# Altium PCB My驱动_V5.PcbDoc
Units mil, origin at the board's own origin, x right, y up, seen from the top; angles counter-clockwise.
Board outline 2237.44 x 1850 mil, 2 copper layers (Top Layer, Bottom Layer); 43 components, 30 nets, 119 pads, 69 vias.
Unrouted connection lines stored in the file: 18.
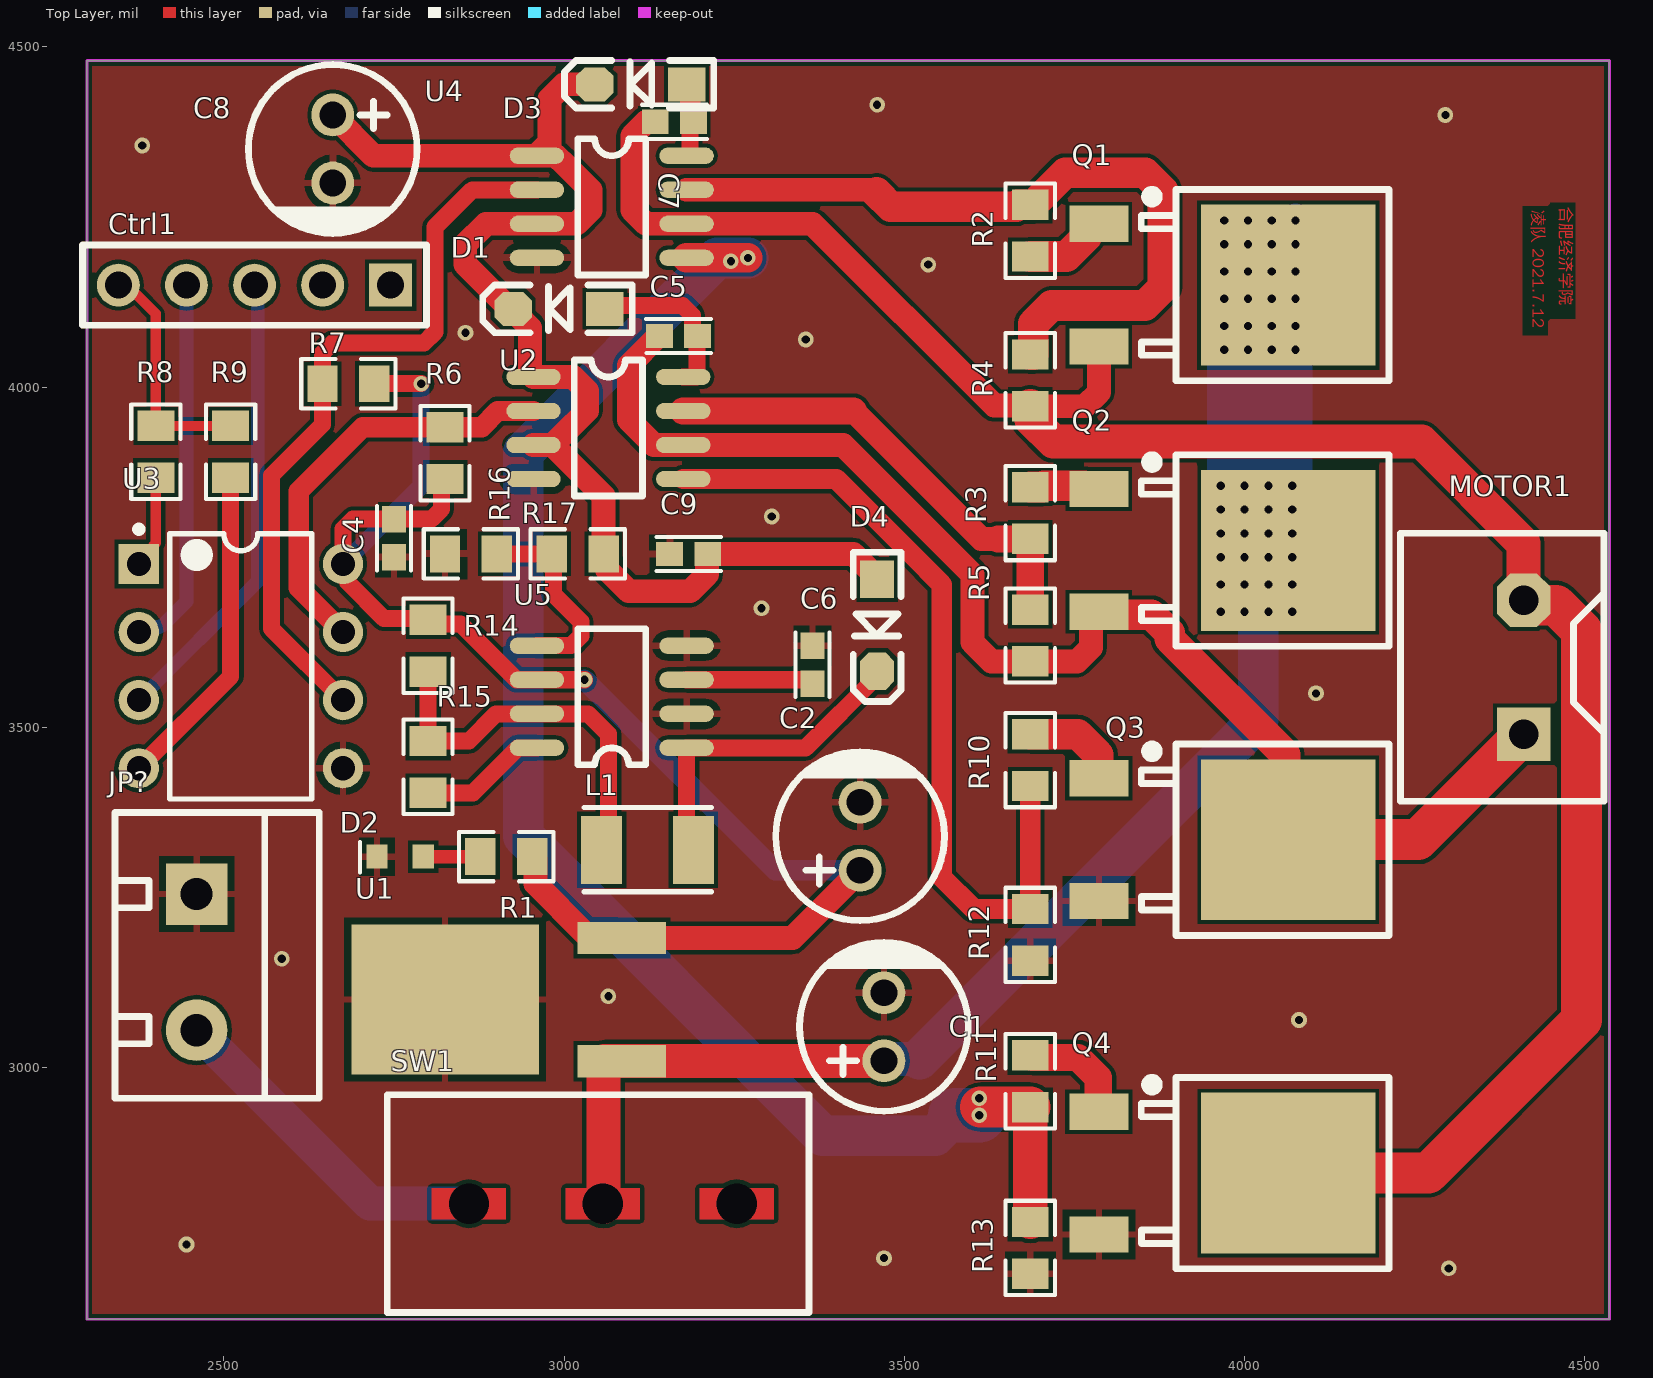
[diagram p0: Top Layer view]
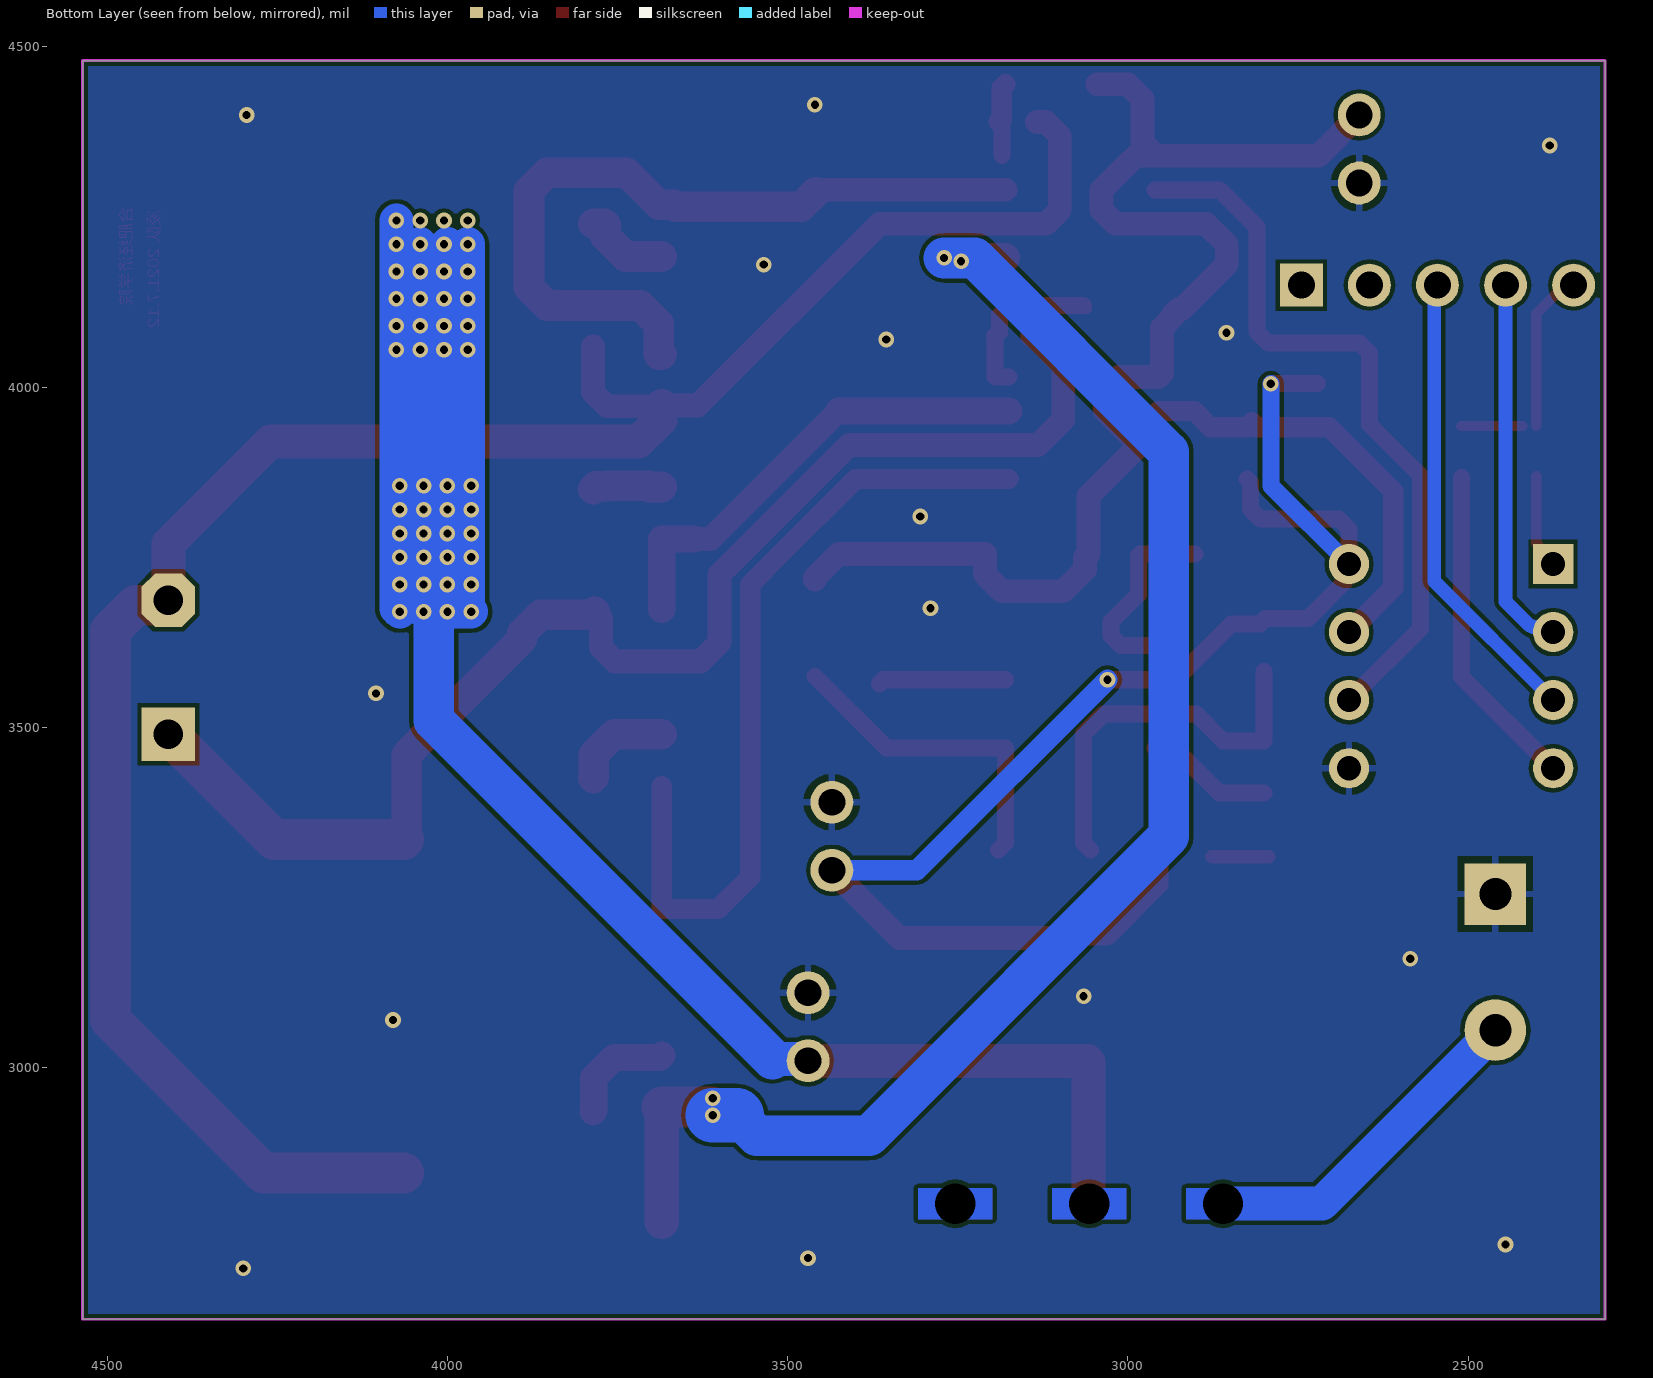
[diagram p1: Bottom Layer view, seen from below]

## Layer stack, top to bottom
Top Solder: solder mask 0.4, Solder Resist, Dk 3.5
Top Layer: signal copper 1.4
Dielectric 1: dielectric 12.6, FR-4, Dk 4.8
Bottom Layer: signal copper 1.4
Bottom Solder: solder mask 0.4, Solder Resist, Dk 3.5

## Board outline
2298.78,2630 4536.22,2630 4536.22,4480 2298.78,4480

## Design rules (kind name [scope] priority, off if disabled: settings)
Clearance [All] p1: gap=6 ignorepadtopadclearanceinfootprint=FALSE
PlaneConnect [All] p1: pad.planeconnectstyle=Relief pad.reliefexpansion=20 pad.reliefentries=4 pad.reliefconductorwidth=10 pad.reliefairgap=10 via.planeconnectstyle=Direct via.reliefexpansion=20 via.reliefentries=4 via.reliefconductorwidth=10 via.reliefairgap=10
PolygonConnect [All] p1: thpad.connectstyle=Relief thpad.reliefconductorwidth=10 thpad.reliefentries=4 thpad.polygonreliefangle="90 Angle" thpad.airgapwidth=10 smdpad.connectstyle=Relief smdpad.reliefconductorwidth=10 smdpad.reliefentries=4 smdpad.polygonreliefangle="90 Angle" smdpad.airgapwidth=10 via.connectstyle=Direct via.reliefconductorwidth=10 via.reliefentries=4 via.polygonreliefangle="90 Angle" via.airgapwidth=10
RoutingVias [All] p1: holewidth=28 width=50 viastyle="Through Hole" minholewidth=28 minwidth=50 maxholewidth=28 maxwidth=50
SolderMaskExpansion [All] p1: expansion=4 istentingtop=FALSE
Width [All] p1: maxlimit=100 minlimit=10 preferedwidth=10
29 further rules are at their usual default settings.

## Components (designator, comment, footprint, x,y, rotation, side; value= is the part's Value field where it differs from the comment)
C1 "220U/16V" CAP-TH_BD6.3-P2.50-D1.0-FD 3470,3060 r90 top
C2 "220u/25V" CAP-TH_BD6.3-P2.50-D1.0-FD 3435,3340 r90 top
C4 "104" LQ_0603 2750,3806 r270 top
C5 "105" LQ_0603 3196,4075 r180 top
C6 "220p" LQ_0603 3365,3564 r90 top
C7 "105" LQ_0603 3190,4390 r180 top
C8 "330u" CAP-TH_BD6.3-P2.50-D1.0-FD 2660,4350 r270 top
C9 "0.1u" LQ_0603 3211,3755 r180 top
Ctrl1 "CON5" LQ_SIP5 2545,4150 r180 top
D1 "1N5819" SOD-123 2992.5,4115 r180 top
D2 "RED" LQ_0603D 2793,3310 r180 top
D3 "1N5819" SOD-123 3112.5,4445 r180 top
D4 "1N5819" SOD-123 3460,3650 r270 top
JP? "HDR-1X2" KF301-5.0-2P 2460,3055 r270 top
L1 "120uH" LQ_1210 3190,3320 r180 top
MOTOR1 "MOTOR IF" LQ_PIN2 4410,3490 r90 top
Q1 "IRLR7843TRPBF" TO-252-2_L6.5-W6.1-P4.58-LS10.0-TR 3925,4150 r90 top
Q2 "IRLR7843TRPBF" TO-252-2_L6.5-W6.1-P4.58-LS10.0-TR 3925,3760 r90 top
Q3 "IRLR7843TRPBF" TO-252-2_L6.5-W6.1-P4.58-LS10.0-TR 3925,3335 r90 top
Q4 "IRLR7843TRPBF" TO-252-2_L6.5-W6.1-P4.58-LS10.0-TR 3925,2845 r90 top
R1 "1K" LQ_0805 2915,3310 r180 top
R2 "33R" LQ_0805 3685,4230 r90 top
R3 "33R" LQ_0805 3685,3815 r90 top
R4 "10K" LQ_0805 3685,4010 r270 top
R5 "10K" LQ_0805 3685,3635 r90 top
R6 "390" LQ_0805 2825,3903.04 r270 top
R7 "390" LQ_0805 2683.04,4005 r0 top
R8 "390" LQ_0805 2400,3905 r90 top
R9 "390" LQ_0805 2510,3905 r90 top
R10 "33R" LQ_0805 3685,3451.96 r270 top
R11 "33R" LQ_0805 3685,2980 r90 top
R12 "10K" LQ_0805 3685,3195 r270 top
R13 "10K" LQ_0805 3685,2735 r90 top
R14 "0R5" LQ_0805 2800,3620 r270 top
R15 "220" LQ_0805 2800,3441.96 r90 top
R16 "3K8" LQ_0805 2863.04,3755 r0 top
R17 "30K" LQ_0805 3020,3755 r180 top
SW1 "SW-SPDT" LQ_SWSIP3 2860,2800 r0 top
U1 "LM7805-5V" LQ_DPAK 3085,3009.45 r90 top
U2 "IR2104" SO-8 2955,4015 r0 top
U3 "HCPL2630" DIP8 2525,3590 r270 top
U4 "IR2104" SO-8 2960,4340 r0 top
U5 "MC34063" SO-8 3180,3470 r180 top

## Footprints (in the part's own frame and the unit in brackets; to place one, negate y for a bottom-side part, rotate by r counter-clockwise, add the part's x,y. Pads: shape width x height; smd on the part's side, far side on the other; paste and mask are expansions set on the pad)
CAP-TH_BD6.3-P2.50-D1.0-FD [mm]
  round 1.6 hole 1: 1(-1.27,0) 2(1.27,0)
  silkscreen extent -3.15,-3.15 3.17,3.15
DIP8 [mm]
  rect 1.5x1.5 hole 0.9: 1(-3.81,-3.81)
  round 1.5 hole 0.9: 2(-1.27,-3.81) 3(1.27,-3.81) 4(3.81,-3.81) 5(3.81,3.81) 6(1.27,3.81) 7(-1.27,3.81) 8(-3.81,3.81)
  silkscreen extent -5.23,-3.93 4.96,2.65
KF301-5.0-2P [mm]
  rect 2.3x2.3 hole 1.2: 1(-5.08,0)
  round 2.3 hole 1.2: 2(0,0)
  silkscreen extent -8.13,-3.05 2.54,4.57, body extent -7.95,-3 2.55,4.6, height 10.05
LQ_0603 [mm]
  rect 1x0.9 smd: 1(0,0) 2(1.422,0)
  silkscreen extent -0.5,-0.64 1.92,0.64
LQ_0603D [mm]
  rect 0.8x0.9 smd: 1(0,0) 2(1.727,0)
  silkscreen extent 2.36,-0.56 2.36,0.58
LQ_0805 [mil]
  rect 44.59x54.21 smd: 1(-38.04,0) 2(38.04,0)
  silkscreen extent -69,-36 69,36
LQ_1210 [mil]
  rect 60x100 smd: 1(0,0) 2(135,0)
  silkscreen extent -26,-62 161,61
LQ_DPAK [mm]
  rect 1.2x3.302 smd: 1(0,0) 3(4.6,0)
  rect 5.6x7 smd: 2(2.3,6.604)
LQ_PIN2 [mm]
  rect 2x2 hole 1.1: 1(0,0)
  oct 2x2 hole 1.1: 2(5,0)
  silkscreen extent -2.5,-3 7.5,4.6, body extent -2.81,-2.97 7.79,4.63, height 10
LQ_SIP5 [mm]
  rect 1.6x1.6 hole 1: 1(-5.08,0)
  round 1.6 hole 1: 2(-2.54,0) 3(0,0) 4(2.54,0) 5(5.08,0)
  silkscreen extent -6.42,-1.5 6.42,1.5
LQ_SWSIP3 [mm]
  round 0 hole 1.5: 1(0,0) 2(5,0) 3(10,0)
  Top Layer region: 11.386,0.574 8.614,0.574 8.614,-0.574 11.386,-0.574
  Top Layer region: 6.386,0.574 3.614,0.574 3.614,-0.574 6.386,-0.574
  Top Layer region: 1.386,0.574 -1.386,0.574 -1.386,-0.574 1.386,-0.574
  Bottom Layer region: 11.386,0.574 8.614,0.574 8.614,-0.574 11.386,-0.574
  Bottom Layer region: 6.386,0.574 3.614,0.574 3.614,-0.574 6.386,-0.574
  Bottom Layer region: 1.386,0.574 -1.386,0.574 -1.386,-0.574 1.386,-0.574
  silkscreen extent -3.05,-4.06 12.7,4.06
SO-8 [mil]
  oval 80x24 smd: 1(0,0) 2(0,-50) 3(0,-100) 4(0,-150) 5(220,-150) 6(220,-100) 7(220,-50) 8(220,0)
  silkscreen extent 60,-175 160,25
SOD-123 [mil] "2.7x1.6X1.1mm（长宽高，不包括引脚）"
  rect 55x50 smd: 1(-67.5,0)
  oct 55x50 smd: 2(67.5,0)
  silkscreen extent -108,-35 112,35, body extent -73,-31 73,31, height 48
TO-252-2_L6.5-W6.1-P4.58-LS10.0-TR [mm]
  rect 1.35x2.2 smd: 1(2.29,3.533) 3(-2.29,3.533)
  rect 6x6.5 smd: 4(0,-3.533)
  silkscreen extent -3.57,-7.3 3.57,1.95

## Part data
C1 C2 C8: library part "CAPACITOR POL", "Capacitor"
C4 C5 C6 C7 C9: library part CAP, "Capacitor"
Ctrl1: "Connector"
D1 D3 D4: library part LQ_DIODE
D2: library part LQ_LED
JP?: library part "Header 2_1", "2P接插件", BOM名称=2P接插件, 学习资源=www.ooocke.com, 版权归属=源创客
L1: library part INDUCTOR
MOTOR1: library part "MOTOR AC"
Q1 Q2 Q3 Q4: BOM_JLCPCB Part Class="Extended Part", BOM_Manufacturer=IR, BOM_Manufacturer Part=IRLR7843TRPBF, BOM_Supplier=LCSC, BOM_Supplier Part=C21988, spicePre=Q, spiceSymbolName=IRLR7843TRPBF
R1 R2 R3 R4 R5 R6 R7 R8 R9 R10 R11 R12 R13 R14 R15 R16 R17: library part RES2
U1: library part LM7805
U3: "6N137 2631"

## Via types
v1: diameter 23, hole 12, Top Layer to Bottom Layer, tented both sides, 69 vias

## Nets (pads, with @x,y where several pads share a name; then routed paths per layer and width w, separated by ;. In a path a pad name is that pad's centre, name@x,y a point inside that pad or via, vN(x,y) a via of type N, cw(c..) or ccw(c..) an arc to the next point about the centre after c; other vN are vias at no path point)
12V: C8.1 C9.1 D1.2 D3.2 D4.1 R17.1 U2.1 U2.3 U4.1 U4.3 | length 1955.9
  Top Layer w35: C8.1 2720,4340 U4.1 ; U2.1@2950,4020.5 2950,4087 2932.75,4104.25 2932.75,4107.5 2925.25,4115 2920.25,4115 2854.62,4180.63 2854.62,4209.62 2885,4240 U4.3 3018.2,4240 3038.71,4260.5 3038.71,4289.5 3002.7,4325.5 3002.5,4325.5 2988,4340 U4.1 ; U2.3 U2.3@2983,3915 ; U2.1 3013,4015 3033.5,3994.5 3033.5,3965.3 2997.7,3929.5 2997.5,3929.5 U2.3@2983,3915 ; D3.2 3000,4445 2978.5,4423.5 2978.5,4359.48 2960,4340.98 U4.1 ; D4.1 3460,3720 3425,3755 C9.1 3210.22,3755 3210,3754.78 3210,3725 3185,3700 3095,3700 3062.84,3732.16 3062.84,3750.21 R17.1 3058.04,3839.96 U2.3@2983,3915
BAT: C1.1 Q1.4 Q2.4 SW1.2 U1.1 | length 3774.4
  Top Layer w50: 3058.15,2795 3058.15,3008.07 3059.53,3009.45 U1.1 3085.28,3009.72 3469.72,3009.72 C1.1 C1.1@3469.17,3010.83
  Bottom Layer w50: C1.1 3472.49,3012.49 3522.49,3012.49 ; v1(3965,3670) v1(4000,3670) ; v1@3970,3675 3970,3710 3970,3750 3970,3785 3970,3820 3970,3855 v1(3970,4055) v1(3970,4090) v1(3970,4130) v1(3970,4170) v1(3970,4210) ; v1@4000,4210 4000,4170 4000,4130 4000,4090 4000,4055 v1(4000,3855) v1(4000,3820) v1(4000,3785) v1(4000,3750) v1(4000,3710) v1(4000,3670) ; 4020,3650 v1(4000,3670) ; v1@4040,3675 4040,3710 4040,3750 4040,3785 4040,3820 4040,3855 v1(4040,4055) v1(4040,4090) v1(4040,4130) v1(4040,4170) v1(4040,4210) ; v1(4070,3670) 4075,3675 v1(4075,4055) v1(4075,4090) v1(4075,4130) v1(4075,4170) v1(4075,4210) v1(4075,4245)
  Bottom Layer w60: 3522.49,3012.49 4020,3510 4020,3650
  other v1: 4035,3670 3965,3710 4035,3710 4070,3710 3965,3750 4035,3750 4070,3750 3965,3785 4035,3785 4070,3785 3965,3820 4035,3820 4070,3820 3965,3855 4035,3855 4070,3855 4005,4055 4005,4090 4005,4130 4005,4170 4005,4210 3970,4245 4005,4245 4040,4245
GND: C1.2 C2.2 C4.2 C6.2 C8.2 C9.2 D2.2 JP?.1 Q3.3 Q4.3 R12.2 R13.1 R16.1 U1.2 U2.4 U3.5 U4.4 U5.2 U5.4
  other v1: 4300,2705 3470,2720 2445,2740 4080,3070 3065,3105 2585,3160 4105,3550 3290,3675 3305,3810 3355,4070 2855,4080 3535,4180 2380,4355 4295,4400 3460,4415
M1: C5.2 MOTOR1.1 Q2.3 Q3.4 R5.1 U2.6 | length 1997.8
  Top Layer w35: C5.2 3139.78,4074.78 3137.82,4074.78 3095,4031.97 3095,3952 3132,3915 U2.6 3410,3915 3600,3725 3600,3625 3628.04,3596.96 R5.1 3753.9,3596.96 3774.4,3617.46 3774.4,3660.76 Q2.3@3783.48,3669.84
  Top Layer w45: Q2.3@3783.48,3669.84 3787.55,3665.76 3862.88,3665.76 3890,3638.64 3890,3630 4060,3460 4060,3339.1 Q3.4
  Top Layer w60: Q3.4 4255,3335 MOTOR1.1
M2: C7.2 MOTOR1.2 Q1.3 Q4.4 R4.2 U4.6 | length 3134.8
  Top Layer w35: C7.2 3133.78,4389.78 3120.5,4389.78 3100,4369.28 3100,4260.5 3120.5,4240 U4.6 3365,4240 3632.2,3972.8 3684.16,3972.8 R4.2 ; R4.2@3689.81,3971.96 3765.4,3971.96 3785.9,3992.46 Q1.3
  Top Layer w40: R4.2 R4.2@3689.81,3971.96
  Top Layer w50: R4.2 3687.11,3969.85 3687.11,3952 3719.1,3920 4260,3920 4410,3770 MOTOR1.2
  Top Layer w60: Q4.4 4270,2845 4495,3070 4495,3642.33 4457.74,3679.59 4417.26,3679.59 MOTOR1.2
M3V3: Ctrl1.5 R8.2 R9.2 | length 327.2
  Top Layer w15: Ctrl1.5 2357.99,4150 2400,4107.99 R8.2 ; R8.2@2420.19,3943.04 R9.2
NetC5_1: C5.1 D1.1 U2.8 | length 251.7
  Top Layer w15: D1.1 D1.1@3065,4120
  Top Layer w25: D1.1@3065,4120 3174.17,4120 3188.82,4105.36 3188.82,4080.22 3190.78,4080.22 C5.1 3195.28,4074.28 3195.28,4015.5 3194.78,4015 U2.8
NetC6_1: C6.1 U5.3 | length 187.9
  Top Layer w25: U5.3 3359.78,3570 3365,3564.78 C6.1
NetC7_1: C7.1 D3.1 U4.8 | length 111.9
  Top Layer w25: U4.8@3185,4340.5 3185,4385 C7.1
  Top Layer w30: D3.1 3185.32,4439.69 3185.32,4392.72 3188.03,4390 C7.1
NetD2_1: D2.1 R1.2 | length 84
  Top Layer w20: D2.1 R1.2
NetD4_2: D4.2 L1.1 U5.1 | length 477.6
  Top Layer w25: L1.1 3180,3330 U5.1 3355,3470 D4.2@3460,3575
NetL1_2: L1.2 R14.2 R15.2 U5.7 | length 570.1
  Top Layer w25: R14.2 R15.2 2860,3480 2900,3520 U5.7 3035,3520 3065,3490 3065,3330 L1.2
NetQ1_1: Q1.1 R2.1 | length 131
  Top Layer w45: R2.1 3738.31,4191.96 3767.59,4221.25 3767.59,4238.59 3769.17,4240.16 Q1.1
NetQ2_1: Q2.1 R3.2 | length 103.7
  Top Layer w45: R3.2 3685.21,3853.25 3703.08,3853.25 3704.83,3855 3764.33,3855 3765.09,3854.24 3781.83,3854.24 Q2.1
NetQ3_1: Q3.1 R10.1 | length 147.6
  Top Layer w45: R10.1 3755,3490 3785,3460 3785,3426.07 Q3.1
NetQ4_1: Q4.1 R11.2 | length 163.9
  Top Layer w40: R11.2 3688.04,3015 3755,3015 3785,2985 3785,2936.07 Q4.1
NetR2_2: R2.2 R4.1 U4.7 | length 1142.1
  Top Layer w35: U4.7 3455,4290 3459,4286
  Top Layer w45: 3459,4286 3480,4265 3664.09,4265 3666.92,4267.84 3684.79,4267.84 R2.2 ; R4.1 3689.4,4048.04 3689.61,4048.25 3689.61,4093.43 3716.17,4120 3853.64,4120 3880,4146.36 3880,4288.64 3853.64,4315 3736.36,4315 R2.2@3689.4,4268.04
NetR3_1: R3.1 R5.2 U2.7 | length 691.8
  Top Layer w35: 3425,3965 3613.04,3776.96 3638.04,3776.96
  Top Layer w40: U2.7 3425,3965 ; 3638.04,3776.96 R3.1 R5.2
NetR8_1: R8.1 U3.1 | length 139.8
  Top Layer w15: U3.1 2397.03,3762.03 2397.03,3767.84 2400,3770.81 R8.1@2400,3869.4
NetR9_1: R9.1 U3.4 | length 482.9
  Top Layer w25: U3.4 2510,3575 R9.1
NetR10_2: R10.2 R12.1 U2.5 | length 1204.5
  Top Layer w30: U2.5 3400,3865 3510,3755 3555,3710 3555,3280 3601.96,3233.04 R12.1 R10.2
NetR11_1: R11.1 R13.2 U4.5 | length 2209.7
  Top Layer w43: U4.5 v1(3270,4190)
  Top Layer w50: R13.2 R11.1
  Top Layer w60: 3611.96,2941.96 R11.1
  Bottom Layer w60: v1(3270,4190) 3225,4190 2940,3905 2940,3340 3380,2900 3545,2900 3575,2930
  Bottom Layer w80: 3575,2930 v1(3610,2930)
  other v1: 3610,2955 3245,4185
NetR15_1: R15.1 U5.8 | length 187.4
  Top Layer w25: R15.1 2865.92,3403.92 2932,3470 U5.8
NetR16_2: R16.2 R17.2 U5.5 | length 289.6
  Top Layer w25: R16.2 R17.2 2984.7,3752.26 2984.7,3695.3 3024.64,3655.36 3024.64,3634.64 3010,3620 U5.5
P1: R6.1 U2.2 U3.7 | length 635.4
  Top Layer w30: U3.7 2610,3705 2610,3847.16 2703.92,3941.08 2812.89,3941.08 2817.71,3945.9 2817.71,3948.38 R6.1 2878.66,3941.08 2902.57,3965 U2.2
P2: R7.1 U3.6 U4.2 | length 1089.5
  Top Layer w25: U3.6 2570,3645 2570,3870 2645,3945 R7.1 2645,4050.36 2659.64,4065 2794.22,4065 2810,4080.78 2810,4235 2865,4290 U4.2
PWM1: Ctrl1.4 U3.2 | length 566.6
  Top Layer w15: Ctrl1.4 Ctrl1.4@2457.99,4150
  Bottom Layer w20: U3.2 2382.47,3647.47 2405.29,3647.47 2407.41,3649.59 2409.59,3649.59 2445,3685 Ctrl1.4
PWM2: Ctrl1.3 U3.3 | length 684.6
  Bottom Layer w20: U3.3 2550,3715 2550,4145 Ctrl1.3
VCC5V: C2.1 C4.1 R1.1 R6.2 R7.2 R14.1 U1.3 U3.8 U5.6 | length 2187.7
  Top Layer w25: R7.2 v1(2790,4005) ; R6.2 2820,3860 2820,3820.64 2805.36,3806 C4.1 2689.64,3806 2675,3791.36 U3.8 2681.52,3733.48 2681.52,3713.48 2735,3660 2798.04,3660 R14.1 2806.09,3651.95 2848.05,3651.95 2930,3570 U5.6 v1(3030,3570)
  Top Layer w35: R1.1 2957.84,3305.21 2957.84,3270.3 3031.46,3196.67 3078.88,3196.67 U1.3 3335.55,3190.55 C2.1
  Bottom Layer w25: U3.8 2790,3855 v1(2790,4005)
  Bottom Layer w30: v1(3030,3570) 3310,3290 C2.1
VCC12V: JP?.2 SW1.1 | length 505.6
  Bottom Layer w50: JP?.2 2715,2800 SW1.1
pads on no net: Ctrl1.1 Ctrl1.2 SW1.3

## Polygon pours and split planes (outlines as drawn)
GND on Top Layer "GND_L01_P000" (solid, remove dead copper, pour order 0): 2298.78,2630 2298.78,4480 4536.22,4480 4536.22,2630
GND on Bottom Layer "GND_L02_P001" (solid, remove dead copper, pour order 1): 2298.78,2630 2298.78,4480 4536.22,4480 4536.22,2630

## Keep-outs
Keep-Out Layer:
  the board outline again, w3.94

## Other copper
Top Layer:
  text "合肥经济学院" at 4457.77,4264.97 h30 r270
  text "凌队 2021.7.12" at 4417.71,4260 h30 r270